# Altium PCB ESP32 With USB C 3rd PCB V1I1.PcbDoc (part 1 of 2)
Units mil, origin at the board's own origin, x right, y up, seen from the top; angles counter-clockwise.
Board outline 2700 x 1000 mil, 4 copper layers (L1, L2, L3, L4), stack 61.583 mil thick; 64 components, 73 nets, 299 pads, 161 vias.
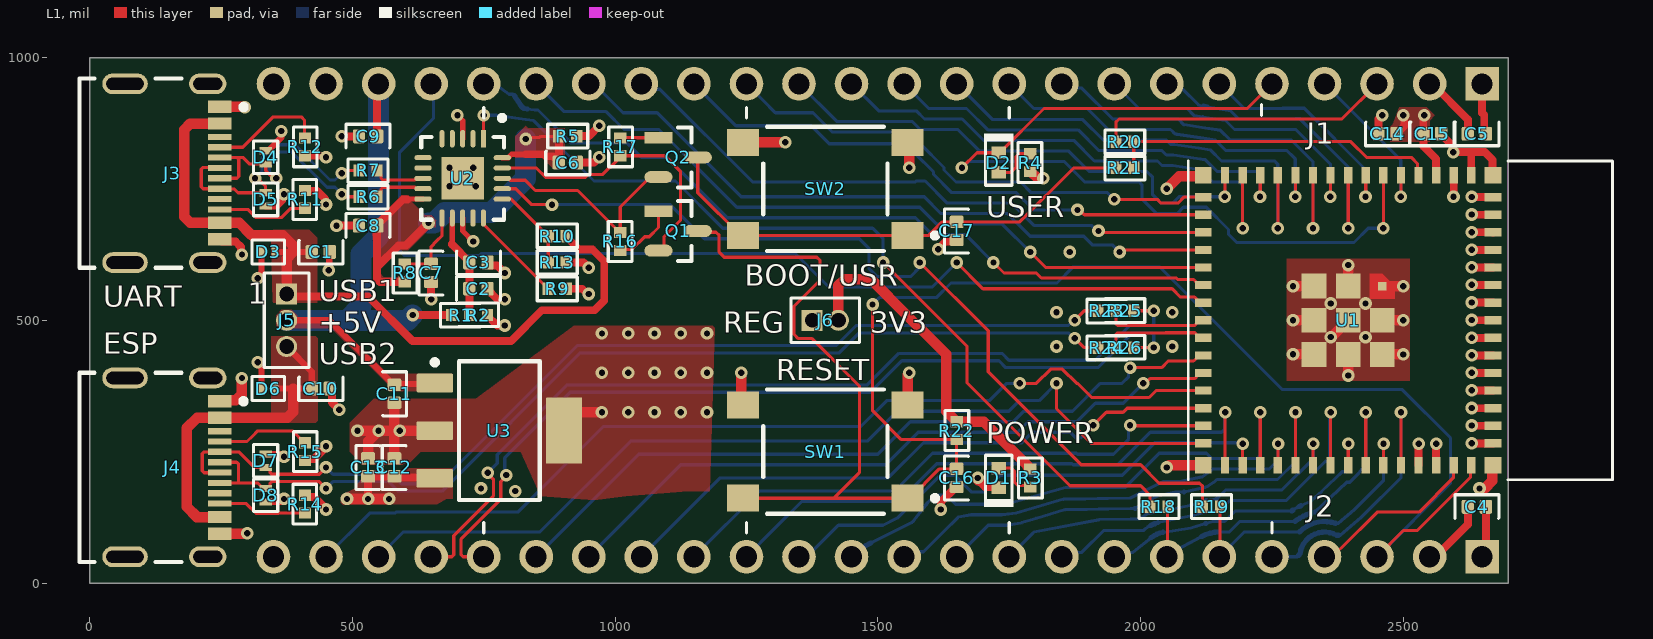
[diagram p0: L1 view]
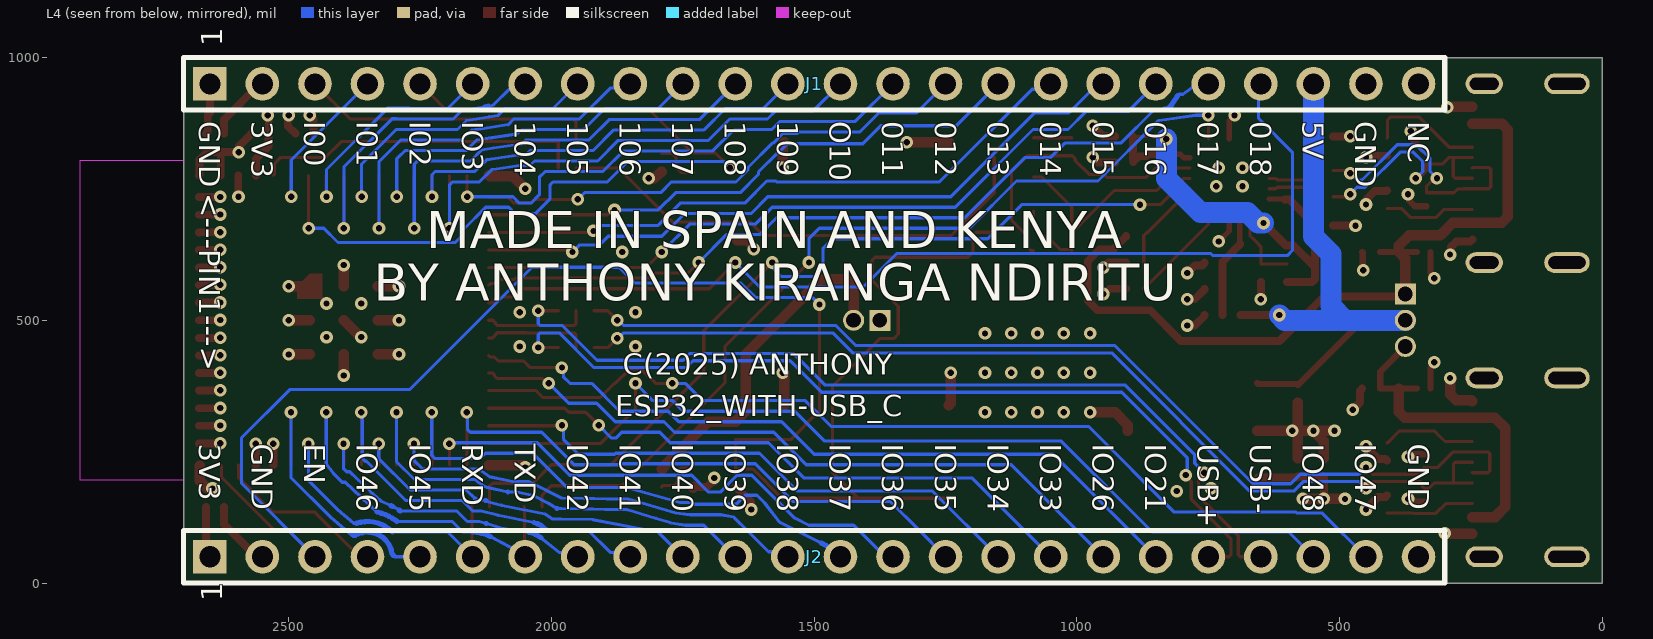
[diagram p1: L4 view, seen from below]
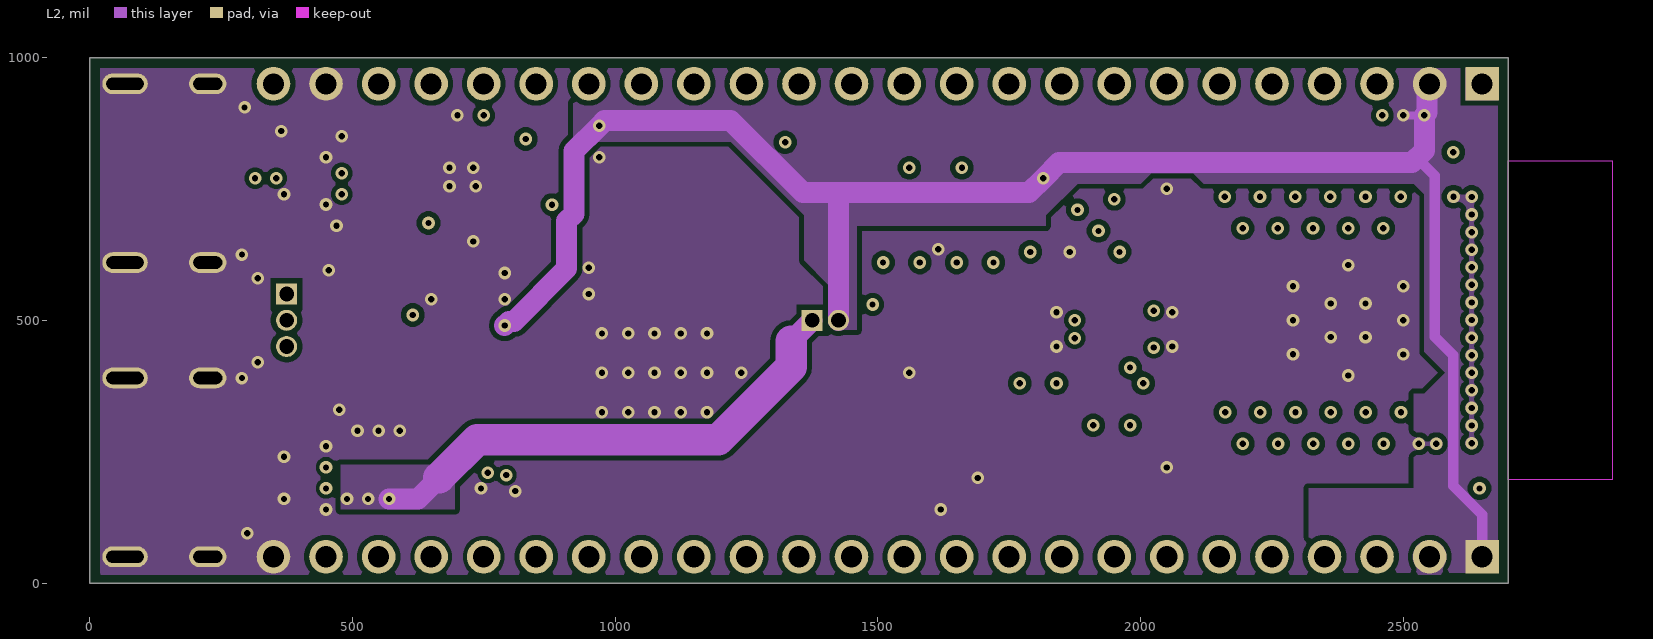
[diagram p2: L2]
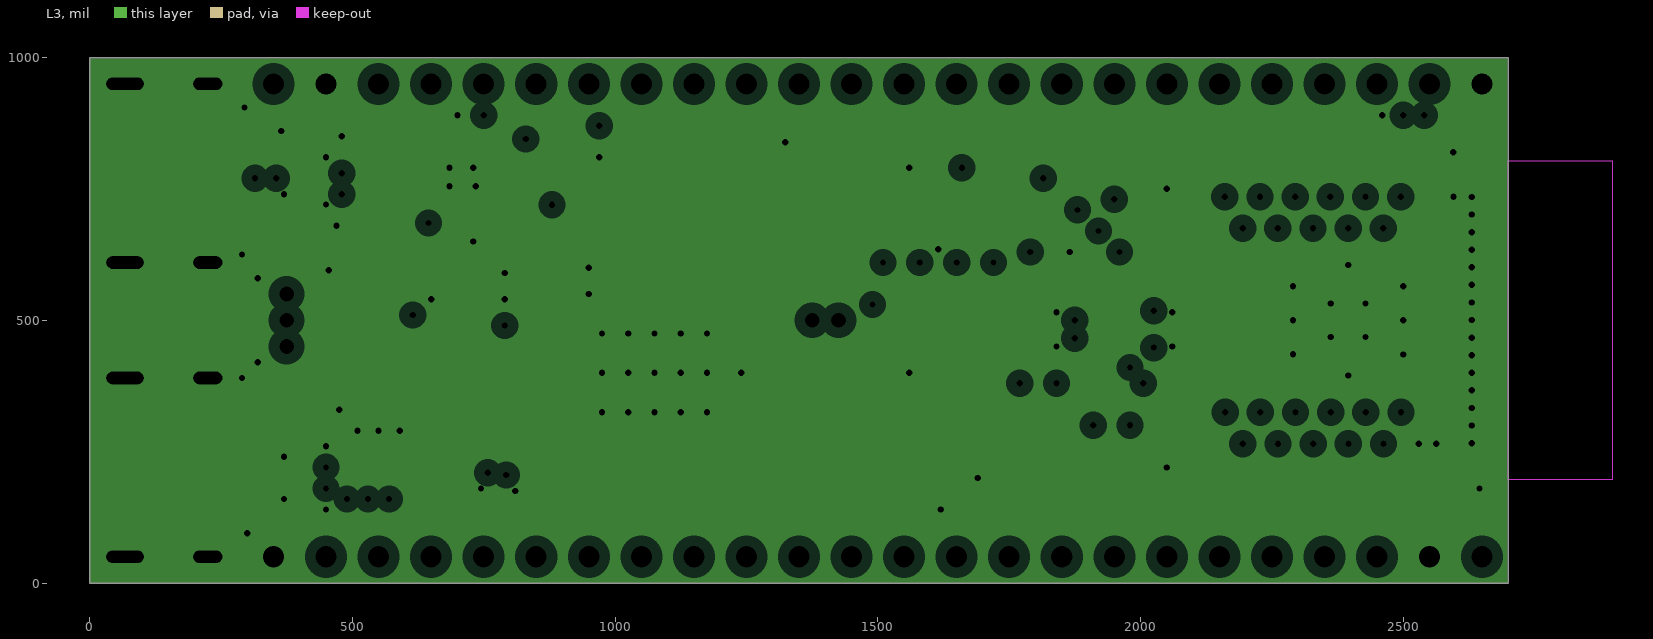
[diagram p3: L3, clearances drawn from the general rule]
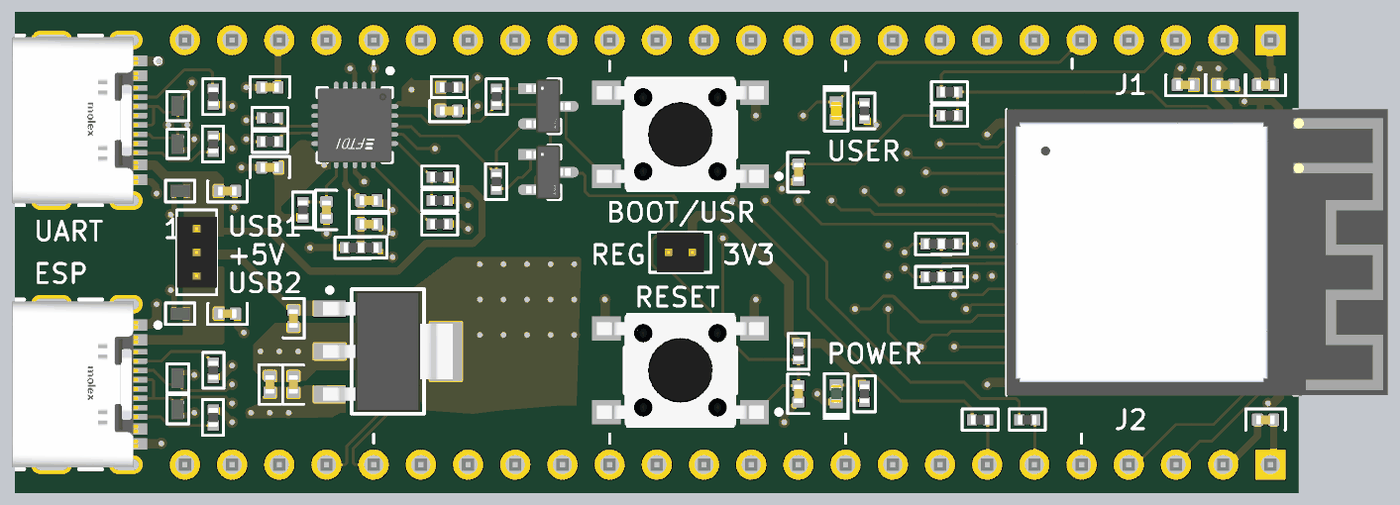
[diagram p4: 3D render of the assembled board from above, using the file's embedded part models]

## Layer stack, top to bottom
Top Solder: solder mask 0.4, Solder Resist, Dk 3.5
L1: signal copper 1.378
Dielectric 2: prepreg 3.9134, PP-006, Dk 4.1
L2: signal copper 0.5984
Dielectric 1: dielectric 49.8031, FR-4, Dk 4.8
L3: plane copper 0.5984, net GND
Dielectric 3: prepreg 3.9134, PP-006, Dk 4.1
L4: signal copper 1.378
Bottom Solder: solder mask 0.4, Solder Resist, Dk 3.5

## Board outline
0,0 2700,0 2700,1000 0,1000

## Design rules (kind name [scope] priority, off if disabled: settings)
Clearance SMALLER [(WithinRoom('FTDI') or WithinRoom('USBC2') or WithinRoom('USBC1')) And (Layer = 'L1')] p1: gap=6 ignorepadtopadclearanceinfootprint=FALSE
Clearance "DIFF90 Clearance" [InDifferentialPairClass('DIFF90')] p2: gap=8 ignorepadtopadclearanceinfootprint=FALSE
Clearance [All] p3: gap=10 ignorepadtopadclearanceinfootprint=FALSE except(6: SMDPad-SMDPad)
ComponentClearance R24R26 [InComponent('R24') vs InComponent('R26')] p1: gap=0 collisioncheckmode=3 verticalgap=0 showdistances=FALSE
ComponentClearance R23R25 [InComponent('R23') vs InComponent('R25')] p2: gap=0 collisioncheckmode=3 verticalgap=0 showdistances=FALSE
ComponentClearance R1R2 [InComponent('R1') vs InComponent('R2')] p3: gap=0 collisioncheckmode=3 verticalgap=0 showdistances=FALSE
ComponentClearance [All] p4: gap=10 collisioncheckmode=3 verticalgap=10 showdistances=FALSE
DiffPairsRouting DIFF90 [InDifferentialPairClass('DIFF90')] p1: maxlimit=8.1 minlimit=8 mostfreqgap=8 toplayer_minwidth=6.03 toplayer_maxwidth=6.23 toplayer_prefwidth=6.03 midlayer1_minwidth=5.1 midlayer1_maxwidth=5.2 midlayer1_prefwidth=5.1 bottomlayer_minwidth=6.03 bottomlayer_maxwidth=6.23 bottomlayer_prefwidth=6.03 maxuncoupledlength=500
MinimumSolderMaskSliver [All] p1: minsoldermaskwidth=3.15
PlaneClearance [All] p1: clearance=20
PlaneConnect [All] p1: pad.planeconnectstyle=Relief pad.reliefexpansion=20 pad.reliefentries=4 pad.reliefconductorwidth=20 pad.reliefairgap=10 via.planeconnectstyle=Direct via.reliefexpansion=20 via.reliefentries=4 via.reliefconductorwidth=10 via.reliefairgap=10
PolygonConnect [All] p1: connectstyle=Direct reliefconductorwidth=10 reliefentries=4 polygonreliefangle="90 Angle" airgapwidth=10
RoomDefinition USBC1 [False vs False] p1: confinementstyle=ConfineIn formatcopy=TRUE lockcomponents=FALSE outline 190,930 310,930 310,630 190,630
RoomDefinition USBC2 [False vs False] p2: confinementstyle=ConfineIn formatcopy=TRUE lockcomponents=FALSE outline 190,370 310,370 310,70 190,70
RoomDefinition FTDI [False vs False] p3: confinementstyle=ConfineIn formatcopy=TRUE lockcomponents=FALSE outline 590,890 830,890 830,650 590,650
RoutingVias [All] p1: holewidth=12 width=24 viastyle="Through Hole" minholewidth=12 minwidth=24 maxholewidth=12 maxwidth=24
SilkToSilkClearance [All] p1: silktosilkclearance=6
SilkToSolderMaskClearance [IsPad] p1: minsilkscreentomaskgap=6 clearancetoexposedcopper=TRUE
SolderMaskExpansion [All] p1: expansion=2 istentingtop=FALSE
Width [All] p1: maxlimit=100 minlimit=6 preferedwidth=10 minimp=50.000000 maximp=50.000000 favimp=50.000000
23 further rules are at their usual default settings.

## Classes and differential pairs
differential pair class DIFF90: CON1_USB CON2_USB CON_ESP_USB ESP_USB FTDI_USB
differential pair FTDI_USB: +FTDI_USB_P -FTDI_USB_N
differential pair ESP_USB: +ESP_USB_P -ESP_USB_N
differential pair CON_ESP_USB: +CON_ESP_USB_P -CON_ESP_USB_N
differential pair CON2_USB: +CON2_USB_P -CON2_USB_N
differential pair CON1_USB: +CON1_USB_P -CON1_USB_N

## Components (designator, comment, footprint, x,y, rotation, side; value= is the part's Value field where it differs from the comment)
C1 "100nf, 50V" CAPC1005X65N 440,630 r0 top
C2 "4µ7, 16V" CAPC1005X65N 740,560 r180 top
C3 "100nf, 50V" CAPC1005X65N 740,610 r0 top
C4 "100nf, 50V" CAPC1005X65N 2640,145 r180 top
C5 "100nf, 50V" CAPC1005X65N 2640,855 r0 top
C6 "100nf, 50V" CAPC1005X65N 910,800 r0 top
C7 "100nf, 50V" CAPC1005X65N 650,590 r270 top
C8 "100nf, 50V" CAPC1005X65N 530,680 r180 top
C9 "100nf, 50V" CAPC1005X65N 530,850 r180 top
C10 "100nf, 50V" CAPC1005X65N 440,370 r0 top
C11 "4µ7, 16V" CAPC1005X65N 580,360 r90 top
C12 "10µF, 10V" CAPC1005X65N 580,220 r270 top
C13 "10µF, 10V" CAPC1005X65N 530,220 r270 top
C14 "10µF, 10V" CAPC1005X65N 2470,855 r0 top
C15 "100nf, 50V" CAPC1005X65N 2555,855 r0 top
C16 "1uF, 35V" CAPC1005X65N 1650,200 r270 top
C17 "100nf, 50V" CAPC1005X65N 1650,670 r270 top
D1 "GREEN" LED0402G 1730,200 r90 top
D2 "Orange" LED0402OR 1730,800 r270 top
D3 "AQ3045-01ETG" SOD882 340,630 r180 top
D4 "AQ3045-01ETG" SOD882 335,810 r90 top
D5 "AQ3045-01ETG" SOD882 335,730 r270 top
D6 "AQ3045-01ETG" SOD882 340,370 r180 top
D7 "AQ3045-01ETG" SOD882 335,232.8 r90 top
D8 "AQ3045-01ETG" SOD882 335,167.2 r270 top
J1 "22-28-4245" HDR_1*24_2.54MM 2650,950 r90 bottom locked
J2 "22-28-4245" HDR_1*24_2.54MM 2650,50 r90 bottom locked
J3 "217179-0001" FP-2171790001-MFG 112.8,779.92 r270 top locked
J4 "217179-0001" FP-2171790001-MFG 112.8,220.08 r270 top locked
J5 "FTS-103-01-F-S" HDR_1*3_1.27MM 375,550 r0 top locked
J6 "FTS-102-01-F-S" HDR_1*2_1.27MM 1375,500 r90 top locked
Q1 "SS8050-G" FP-SS8050-G-IPC_B 1120,670 r0 top
Q2 "SS8050-G" FP-SS8050-G-IPC_B 1120,810 r0 top
R1 "0R" RESC1005X37N 705.98,510 r0 top
R2 "0R" RESC1005X37N 740,510 r180 top
R3 "1K" RESC1005X37N 1790,200 r90 top
R4 "1K" RESC1005X37N 1790,800 r270 top
R5 "0R" RESC1005X37N 910,850 r180 top
R6 "27R" RESC1005X37N 530,735 r0 top
R7 "27R" RESC1005X37N 530,785 r0 top
R8 "0R" RESC1005X37N 600,590 r90 top
R9 "10K" RESC1005X37N 890,560 r0 top
R10 "4K7" RESC1005X37N 890,660 r180 top
R11 "5K1" RESC1005X37N 410,730 r270 top
R12 "5K1" RESC1005X37N 410,830 r90 top
R13 "10K" RESC1005X37N 890,610 r180 top
R14 "5K1" RESC1005X37N 410,150 r270 top
R15 "5K1" RESC1005X37N 410,250 r90 top
R16 "10K" RESC1005X37N 1010,650 r270 top
R17 "10K" RESC1005X37N 1010,830 r90 top
R18 "0R" RESC1005X37N 2035,145 r180 top
R19 "0R" RESC1005X37N 2135,145 r180 top
R20 "27R" RESC1005X37N 1970,840 r0 top
R21 "27R" RESC1005X37N 1970,790 r0 top
R22 "10K" RESC1005X37N 1650,290 r90 top
R23 "0R" RESC1005X37N 1935.98,518 r0 top
R24 "0R" RESC1005X37N 1935.98,448 r0 top
R25 "0R" RESC1005X37N 1970,518 r180 top
R26 "0R" RESC1005X37N 1970,448 r180 top
SW1 "PTS645SH50SMTR92LFS" FP-PTS645SH50SMTR92LFS-MFG 1400,250 r180 top locked
SW2 "PTS645SH50SMTR92LFS" FP-PTS645SH50SMTR92LFS-MFG 1400,750 r180 top locked
U1 "ESP32-S3-MINI-1-N8" XCVR_ESP32-S3-MINI-1-N8 2395.04,500 r270 top locked
U2 "FT231XQ-R" FP-QFN-20-IPC_B 710,770 r270 top locked
U3 "TL1963A-33DCYR" DCY0004A_N 780,290 r0 top locked

## Footprints (in the part's own frame and the unit in brackets; to place one, negate y for a bottom-side part, rotate by r counter-clockwise, add the part's x,y. Pads: shape width x height; smd on the part's side, far side on the other; paste and mask are expansions set on the pad)
CAPC1005X65N [mm]
  rrect25% 0.6x0.67 smd: 1(-0.437,0) 2(0.437,0)
  silkscreen extent -1.07,-0.58 1.07,0.56, body extent -0.5,-0.25 0.5,0.25, height 0.65
DCY0004A_N [mm] "SOT223, 4-Leads, Body 6.7x3.7mm, Pitch 2.3mm, IPC Medium Density"
  rrect11% 1.75x0.9 smd: 1(-3.125,2.3) 2(-3.125,0) 3(-3.125,-2.3)
  rrect6% 1.75x3.2 smd: 4(3.125,0)
  silkscreen extent -3.25,-3.35 1.95,3.42, body extent -3.5,-3.25 3.5,3.25, height 1.62
FP-2171790001-MFG [mm]
  rect 0.6x1.15 smd paste+0 mask+0: A1B12(-3.2,3.425) A4B9(-2.4,3.425) B1A12(3.2,3.425) B4A9(2.4,3.425)
  rect 0.3x1.15 smd paste+0 mask+0: A5(-1.25,3.425) A6(-0.25,3.425) A7(0.25,3.425) A8(1.25,3.425) B5(1.75,3.425) B6(0.75,3.425) B7(-0.75,3.425) B8(-1.75,3.425)
  rrect100% 1x1.8 hole 1.4 slot 0.6 at 0 deg paste-2539.97 mask+0: S1(-4.32,2.85) S2(4.32,2.85)
  rrect100% 1x2.2 hole 1.8 slot 0.6 at 0 deg paste-2539.97 mask+0: S3(-4.32,-1.15) S4(4.32,-1.15)
  silkscreen extent -4.57,-3.35 4.57,4.7, body extent -4.92,-3.45 4.92,4.1, height 0.25
FP-PTS645SH50SMTR92LFS-MFG [mm]
  rect 1.55x1.3 smd paste+0 mask+0: 1(-3.975,2.25) 2(3.975,2.25) 3(-3.975,-2.25) 4(3.975,-2.25)
  silkscreen extent -5.43,-3 3,3, body extent -4.5,-3 4.5,3, height 4.3
FP-QFN-20-IPC_B [mm]
  rect 0.84x0.242 smd paste+0 mask+0: 1(-1.916,1)
  rrect100% 0.84x0.242 smd paste+0 mask+0: 2(-1.916,0.5) 3(-1.916,0) 4(-1.916,-0.5) 5(-1.916,-1) 11(1.916,-1) 12(1.916,-0.5) 13(1.916,0) 14(1.916,0.5) 15(1.916,1)
  rrect100% 0.242x0.84 smd paste+0 mask+0: 6(-1,-1.916) 7(-0.5,-1.916) 8(0,-1.916) 9(0.5,-1.916) 10(1,-1.916) 16(1,1.916) 17(0.5,1.916) 18(0,1.916) 19(-0.5,1.916) 20(-1,1.916)
  rect 2.05x2.05 smd paste-1000 mask+0: 21(0,0)
  silkscreen extent -3.05,-2 2,2.03, body extent -2.59,-2.59 2.59,2.59, height 0.25
FP-SS8050-G-IPC_B [mm]
  rect 1.357x0.572 smd paste+0 mask+0: 1(-0.951,0.95)
  rrect100% 1.357x0.572 smd paste+0 mask+0: 2(-0.951,-0.95) 3(0.951,0)
  silkscreen extent 0,-1.45 0.65,1.45, body extent -1.88,-1.7 1.88,1.7, height 0.25
HDR_1*2_1.27MM [mil]
  rect 40x40 hole 28: 1(0,0)
  round 40 hole 28: 2(0,-50)
  silkscreen extent -42,-90 43,40, body extent -42,-75 43,25, height 154
HDR_1*3_1.27MM [mil]
  rect 40x40 hole 28: 1(0,0)
  round 40 hole 28: 2(0,-50) 3(0,-100)
  silkscreen extent -42,-140 42,40, body extent -42,-125 42,25, height 154
HDR_1*24_2.54MM [mil]
  rect 64x64 hole 40: 1(0,0)
  round 64 hole 40: 2(0,-100) 3(0,-200) 4(0,-300) 5(0,-400) 6(0,-500) 7(0,-600) 8(0,-700) 9(0,-800) 10(0,-900) 11(0,-1000) 12(0,-1100) 13(0,-1200) 14(0,-1300) 15(0,-1400) 16(0,-1500) 17(0,-1600) 18(0,-1700) 19(0,-1800) 20(0,-1900) 21(0,-2000) 22(0,-2100) 23(0,-2200) 24(0,-2300)
  silkscreen extent -50,-2350 50,50, body extent -49,-2350 49,50, height 386
LED0402G [mm]
  rect 0.6x0.7 smd: 1(-0.475,0) 2(0.475,0)
  silkscreen extent -1.4,-0.71 1.09,0.71, body extent -0.5,-0.3 0.5,0.3, height 0.21
LED0402OR [mm]
  rect 0.6x0.7 smd: 1(-0.475,0) 2(0.475,0)
  silkscreen extent -1.4,-0.71 1.09,0.71, body extent -0.5,-0.3 0.5,0.3, height 0.21
RESC1005X37N [mm]
  rect 0.54x0.6 smd: 1(-0.432,0) 2(0.432,0)
  silkscreen extent -0.97,-0.58 0.97,0.56, body extent -0.5,-0.25 0.5,0.25, height 0.37
SOD882 [mm]
  rect 0.35x0.6 smd: 1(-0.325,0) 2(0.325,0)
  silkscreen extent -0.79,-0.58 0.79,0.58, body extent -0.54,-0.34 0.54,0.34, height 0.44
XCVR_ESP32-S3-MINI-1-N8 [mm]
  rect 0.8x0.4 smd: 1(-7,5.95) 2(-7,5.1) 3(-7,4.25) 4(-7,3.4) 5(-7,2.55) 6(-7,1.7) 7(-7,0.85) 8(-7,0) 9(-7,-0.85) 10(-7,-1.7) 11(-7,-2.55) 12(-7,-3.4) 13(-7,-4.25) 14(-7,-5.1) 15(-7,-5.95) 31(7,-5.95) 32(7,-5.1) 33(7,-4.25) 34(7,-3.4) 35(7,-2.55) 36(7,-1.7) 37(7,-0.85) 38(7,0) 39(7,0.85) 40(7,1.7) 41(7,2.55) 42(7,3.4) 43(7,4.25) 44(7,5.1) 45(7,5.95)
  rect 0.4x0.8 smd: 16(-5.95,-7) 17(-5.1,-7) 18(-4.25,-7) 19(-3.4,-7) 20(-2.55,-7) 21(-1.7,-7) 22(-0.85,-7) 23(0,-7) 24(0.85,-7) 25(1.7,-7) 26(2.55,-7) 27(3.4,-7) 28(4.25,-7) 29(5.1,-7) 30(5.95,-7) 46(5.95,7) 47(5.1,7) 48(4.25,7) 49(3.4,7) 50(2.55,7) 51(1.7,7) 52(0.85,7) 53(0,7) 54(-0.85,7) 55(-1.7,7) 56(-2.55,7) 57(-3.4,7) 58(-4.25,7) 59(-5.1,7) 60(-5.95,7)
  rect 1.2x1.2 smd: 61(0,0) 67(0,1.65) 68(1.65,1.65) 69(-1.65,0) 70(1.65,0) 71(-1.65,-1.65) 72(0,-1.65) 73(1.65,-1.65)
  rect 0.8x0.8 smd: 62(-7,7) 63(-7,-7) 64(7,-7) 65(7,7)
  rect 0.4x0.4 smd paste-1 mask+0: 66(-1.65,1.65)
  L1 region: -1.05,1.05 -2.25,1.05 -2.25,1.65 -1.65,2.25 -1.05,2.25
  Keep-Out Layer region: 7.7,7.725 -7.7,7.725 -7.7,12.775 7.7,12.775
  Keep-Out Layer region: 7.7,7.725 -7.7,7.725 -7.7,12.775 7.7,12.775
  silkscreen extent -7.7,-7.73 7.7,12.78, body extent -7.7,-7.72 7.7,12.78, height 2.56

## Part data
C1 C3 C4 C5 C6 C7 C8 C9 C10 C15 C17: library part CL05B104KB5NNNC, "CAP CER 0.1UF 50V X7R 0402", Capacitance=100nF, Case/Package=343Case, Dielectric=1511DielectricType, LCSC Part Number=C960916, Manufacturer=Samsung, Max Operating Temperature=125°C, Min Operating Temperature=-55°C, Supplier Part Number=1276-CL05B104KB5NNNCCT-ND, Tolerance=10%, Voltage Rating=50V, Category="Ceramic Capacitors", ComponentLink1Description=https://datasheet.octopart.com/CL05B104KB5NNNC-Samsung-datasheet-97040617.pdf?src-supplier=Future+Electronics, ComponentLink1URL=https://datasheet.octopart.com/CL05B104KB5NNNC-Samsung-datasheet-97040617.pdf?src-supplier=Future+Electronics, ComponentLink2Description=https://datasheet.octopart.com/CL05B104KB5NNNC-Samsung-datasheet-8326407.pdf?src-supplier=TME, ComponentLink2URL=https://datasheet.octopart.com/CL05B104KB5NNNC-Samsung-datasheet-8326407.pdf?src-supplier=TME, Height=550um, Manufacturer Part Number=CL05B104KB5NNNC, Material=4241ConductorMaterial, Pricing="1=0.08, 10=0.014, 50=0.0096, 100=0.0077 (USD)", RoHS=Yes, RoHS Compliant=Yes, Stock=285974, Supplier=Digikey, Voltage Rating (DC)=50V
C2 C11: library part CL05A475MO5NUNC, "CAP CER 4.7UF 16V X5R 0402", Capacitance=4.7uF, Case Code (Imperial)=0402, Case Code (Metric)=1005, LCSC Part Number=C318563, Manufacturer=Samsung, Max Operating Temperature=85°C, Min Operating Temperature=-55°C, Supplier Part Number=1276-6836-1-ND, Tolerance=20%, Voltage Rating=16V, Case/Package=0402, Category="Ceramic Capacitors", ComponentLink1Description=http://www.farnell.com/datasheets/2710653.pdf?src-supplier=Farnell, ComponentLink1URL=http://www.farnell.com/datasheets/2710653.pdf?src-supplier=Farnell, ComponentLink2Description=http://www.samsungsem.com/kr/support/product-search/mlcc/CL05A475MO5NUNC.jsp?src-supplier=Digikey, ComponentLink2URL=http://www.samsungsem.com/kr/support/product-search/mlcc/CL05A475MO5NUNC.jsp?src-supplier=Digikey, ComponentLink3Description=http://www.farnell.com/datasheets/2710653.pdf?src-supplier=Element14, ComponentLink3URL=http://www.farnell.com/datasheets/2710653.pdf?src-supplier=Element14, ComponentLink4Description=https://datasheet.octopart.com/CL05A475MO5NUNC-Samsung-Electro-Mechanics-datasheet-123102911.pdf?src-supplier=Future+Electronics, ComponentLink4URL=https://datasheet.octopart.com/CL05A475MO5NUNC-Samsung-Electro-Mechanics-datasheet-123102911.pdf?src-supplier=Future+Electronics, ComponentLink5Description=http://www.farnell.com/datasheets/2710653.pdf?src-supplier=Newark, ComponentLink5URL=http://www.farnell.com/datasheets/2710653.pdf?src-supplier=Newark, Height=550um, Length=0.039inch, Manufacturer Part Number=CL05A475MO5NUNC, Material=4241ConductorMaterial, Mount="Surface Mount", Packaging="Cut Tape", Pricing="1=0.14, 10=0.088, 50=0.085 (USD)", RoHS=Yes, RoHS Compliant=Yes, Series=CL, Stock=33153, Supplier=Digikey, Thickness=0.022inch, Voltage Rating (DC)=16V, Width=0.02inch
C12 C13 C14: library part CL05A106MP5NRNC, "CAP CER 10UF 10V X5R 0402", Capacitance=10uF, Case/Package=343Case, LCSC Part Number=C3035383, Manufacturer=Samsung, Max Operating Temperature=85°C, Min Operating Temperature=-55°C, Supplier Part Number=1276-CL05A106MP5NRNCCT-ND, Tolerance=20%, Voltage Rating=10V, Category="Ceramic Capacitors", Height=550um, Manufacturer Part Number=CL05A106MP5NRNC, Material=4241ConductorMaterial, Pricing="1=0.24, 10=0.141, 50=0.1014, 100=0.0894, 500=0.07112, 1000=0.06284, 2500=0.05624, 5000=0.05227 (USD)", RoHS=Yes, RoHS Compliant=Yes, Stock=2113, Supplier=Digikey
C16: library part CL05A105KL5NRNC, "CAP CER 1UF 35V X5R 0402", Capacitance=1uF, Case Code (Imperial)=0402, Case Code (Metric)=1005, LCSC Part Number=C307413, Manufacturer=Samsung, Max Operating Temperature=85°C, Min Operating Temperature=-55°C, Supplier Part Number=1276-6796-1-ND, Tolerance=10%, Voltage Rating=35V, Case/Package=0402, Category="Ceramic Capacitors", ComponentLink1Description=http://www.samsungsem.com/kr/support/product-search/mlcc/CL05A105KL5NRNC.jsp?src-supplier=Digikey, ComponentLink1URL=http://www.samsungsem.com/kr/support/product-search/mlcc/CL05A105KL5NRNC.jsp?src-supplier=Digikey, ComponentLink2Description=https://datasheet.octopart.com/CL05A105KL5NRNC-Samsung-datasheet-8326407.pdf?src-supplier=TME, ComponentLink2URL=https://datasheet.octopart.com/CL05A105KL5NRNC-Samsung-datasheet-8326407.pdf?src-supplier=TME, Height=550um, Length=0.039inch, Manufacturer Part Number=CL05A105KL5NRNC, Material=4241ConductorMaterial, Mount="Surface Mount", Packaging="Cut Tape", Pricing="1=0.29, 10=0.17, 50=0.124, 100=0.1097, 500=0.08014, 1000=0.07807, 2500=0.07048, 5000=0.06578 (USD)", RoHS=Yes, RoHS Compliant=Yes, Series=CL, Stock=31548, Supplier=Digikey, Thickness=0.022inch, Width=0.02inch
D1: library part VLMG1500-GS08, "LED YLW-GRN 0402 SMD", Case Code (Imperial)=0402, Case Code (Metric)=1005, Color=Green,Yellow, Forward Current=30mA, Forward Voltage=2V, Illumination Color=Green, LCSC Part Number=C511404, Lens Color=Clear, Manufacturer=Vishay, Max Operating Temperature=85°C, Min Operating Temperature=-30°C, Package Quantity=1, Power Dissipation=75mW, Reverse Voltage=5V, Supplier Part Number=VLMG1500-GS08CT-ND, Test Current=20mA, Case/Package=0402, Category=LEDs, ComponentLink1Description=https://datasheet.ciiva.com/12071/vlmo1500-244705-12071911.pdf?src-supplier=Mouser, ComponentLink1URL=https://datasheet.ciiva.com/12071/vlmo1500-244705-12071911.pdf?src-supplier=Mouser, ComponentLink2Description=https://datasheet.ciiva.com/30005/vlmo1500-30005134.pdf?src-supplier=Avnet, ComponentLink2URL=https://datasheet.ciiva.com/30005/vlmo1500-30005134.pdf?src-supplier=Avnet, Depth=0.5mm, Dominant Wavelength=571nm, Height=0.35mm, Lead Free="Lead Free", Length=1mm, Lens Style=Rectangular, Luminous Intensity=35mcd, Manufacturer Part Number=VLMG1500-GS08, Mount="Surface Mount", Number of Elements=1, Number of LEDs=1, Number of Pins=2, Packaging="Tape and Reel", Power Rating=75mW, Pricing="1=0.24, 10=0.164, 100=0.1147, 500=0.09218, 1000=0.0847 (USD)", Radiation Hardening=No, Reach SVHC Compliant=Unknown, RoHS=Yes, RoHS Compliant=Yes, Series=CHipLED, Stock=200967, Supplier=Digikey, Viewing Angle=130°, Wavelength=571nm, Width=0.5mm
D2: library part VLMO1500-GS08, "LED ORANGE 0402 SMD", LCSC Part Number=C3000857, Manufacturer=Vishay, Supplier Part Number=VLMO1500-GS08CT-ND, Category=LEDs, ComponentLink1Description=https://datasheet.ciiva.com/13945/vlmo1500-13945355.pdf?src-supplier=Digikey, ComponentLink1URL=https://datasheet.ciiva.com/13945/vlmo1500-13945355.pdf?src-supplier=Digikey, ComponentLink2Description=https://datasheet.ciiva.com/13945/vlmo1500-13945356.pdf?src-supplier=Digikey, ComponentLink2URL=https://datasheet.ciiva.com/13945/vlmo1500-13945356.pdf?src-supplier=Digikey, ComponentLink3Description=https://datasheet.ciiva.com/13945/vlmo1500-13945357.pdf?src-supplier=Digikey, ComponentLink3URL=https://datasheet.ciiva.com/13945/vlmo1500-13945357.pdf?src-supplier=Digikey, Manufacturer Part Number=VLMO1500-GS08, Pricing="1=0.24, 10=0.164, 100=0.1147, 500=0.09218, 1000=0.0847 (USD)", RoHS=Yes, Stock=110225, Supplier=Digikey
D3 D4 D5 D6 D7 D8: "TVS DIODE 5.3VWM 12VC SOD882", LCSC Part Number=C3710326, Leakage Current=100nA, Manufacturer=Littelfuse, Max Operating Temperature=150°C, Min Breakdown Voltage=6.8V, Min Operating Temperature=-55°C, Operating Supply Voltage=5.3V, Peak Pulse Current=3A, Peak Pulse Power=40W, Power Line Protection=No, Supplier Part Number=F9321CT-ND, Category="TVS Diodes", ComponentLink1Description=https://www.littelfuse.com/~/media/electronics/datasheets/tvs_diode_arrays/littelfuse_tvs_diode_array_aq3045_datasheet.pdf.pdf?src-supplier=Digikey, ComponentLink1URL=https://www.littelfuse.com/~/media/electronics/datasheets/tvs_diode_arrays/littelfuse_tvs_diode_array_aq3045_datasheet.pdf.pdf?src-supplier=Digikey, ComponentLink2Description=http://www.littelfuse.com/~/media/electronics/datasheets/tvs_diode_arrays/littelfuse_tvs_diode_array_aq3045_datasheet.pdf.pdf?src-supplier=Digikey, ComponentLink2URL=http://www.littelfuse.com/~/media/electronics/datasheets/tvs_diode_arrays/littelfuse_tvs_diode_array_aq3045_datasheet.pdf.pdf?src-supplier=Digikey, Diode Type=ZENER, Manufacturer Part Number=AQ3045-01ETG, Mount="Surface Mount", Number of Bidirectional Channels=1, Number of Channels=1NUMBER, Packaging="Cut Tape", Pricing="1=0.43, 10=0.271, 100=0.141, 500=0.131 (USD)", Reverse Standoff Voltage=5.3V, RoHS=Yes, RoHS Compliant=Yes, Series="Automotive, AEC-Q101, AQ3045, SPA®", Stock=7306, Supplier=Digikey
J1 J2: "CONN HEADER VERT 24POS 2.54MM", Current Rating=4A, Housing Color=Black, LCSC Part Number=C7145888, Manufacturer=Molex, Supplier Part Number=900-0022284245-ND, Category="Headers and Wire Housings", ComponentLink1Description=https://datasheet.ciiva.com/6814/022284363-sd-6814049.pdf?src-supplier=Digikey, ComponentLink1URL=https://datasheet.ciiva.com/6814/022284363-sd-6814049.pdf?src-supplier=Digikey, ComponentLink2Description=https://datasheet.ciiva.com/10075/0022284245-pcb-headers-10075617.pdf?src-supplier=Avnet, ComponentLink2URL=https://datasheet.ciiva.com/10075/0022284245-pcb-headers-10075617.pdf?src-supplier=Avnet, ComponentLink3Description=https://datasheet.ciiva.com/1433/1597854-1433759.pdf?src-supplier=Element14, ComponentLink3URL=https://datasheet.ciiva.com/1433/1597854-1433759.pdf?src-supplier=Element14, Contact Material=Brass, Contact Plating=Gold, Gender=Male, Lead Free="Lead Free", Manufacturer Part Number=22-28-4245, Mount="Through Hole", Number of Circuits=24, Number of Contacts=24, Number of Positions=24, Number of Rows=1, Orientation=Vertical, Packaging=Bulk, Pitch=2.54mm, Plating=Tin, Pricing="1=1.21, 10=1.024, 100=0.8699, 500=0.77638, 1000=0.73932, 5000=0.65998, 10000=0.62851 (USD)", Reach SVHC Compliant=4188SVHC, RoHS=No, Stock=1536, Supplier=Digikey, Termination=Solder
J3 J4: "CONN RCP USB2.0 TYP C 24P SMD RA", Current Rating=1.25A, LCSC Part Number=C3197684, Manufacturer=Molex, Max Operating Temperature=85°C, Min Operating Temperature=-40°C, Supplier Part Number=900-2171790001CT-ND, Voltage Rating=30V, Category=Connectors, Contact Material=Nickel,Gold, Gender=Receptacle, Height=3.36mm, Manufacturer Part Number=217179-0001, Number of Contacts=16, Pricing="1=0.83, 10=0.704, 25=0.6596, 50=0.628, 100=0.598, 250=0.56052, 500=0.53374 (USD)", RoHS=No, Stock=16804, Supplier=Digikey, USB Standard="USB 2.0"
J5: "CONN HEADER VERT 3POS 1.27MM", LCSC Part Number=C3333578, Manufacturer=Samtec, Supplier Part Number=612-FTS-103-01-F-S-ND, Category=Connectors, ComponentLink1Description=http://www.samtec.com/documents/webfiles/pdf/FTS.pdf?src-supplier=Avnet, ComponentLink1URL=http://www.samtec.com/documents/webfiles/pdf/FTS.pdf?src-supplier=Avnet, ComponentLink2Description=http://suddendocs.samtec.com/prints/fts-1xx-xx-xx-xx-xx-mkt.pdf?src-supplier=Digikey, ComponentLink2URL=http://suddendocs.samtec.com/prints/fts-1xx-xx-xx-xx-xx-mkt.pdf?src-supplier=Digikey, ComponentLink3Description=https://datasheet.octopart.com/FTS-103-01-F-S-Samtec-datasheet-116535195.pdf?src-supplier=Toby+Electronics, ComponentLink3URL=https://datasheet.octopart.com/FTS-103-01-F-S-Samtec-datasheet-116535195.pdf?src-supplier=Toby+Electronics, ComponentLink4Description=https://datasheet.octopart.com/FTS-103-01-F-S-Samtec-datasheet-151470456.pdf?src-supplier=Sager+Electronics, ComponentLink4URL=https://datasheet.octopart.com/FTS-103-01-F-S-Samtec-datasheet-151470456.pdf?src-supplier=Sager+Electronics, ComponentLink5Description=https://datasheet.octopart.com/FTS-103-01-F-S-Samtec-datasheet-118493358.pdf?src-supplier=Electro+Sonic, ComponentLink5URL=https://datasheet.octopart.com/FTS-103-01-F-S-Samtec-datasheet-118493358.pdf?src-supplier=Electro+Sonic, Gender=29Gender, Manufacturer Part Number=FTS-103-01-F-S, Pricing="1=0.73, 50=0.6378, 100=0.5407, 500=0.4491, 1000=0.384 (USD)", RoHS=Yes, Stock=679, Supplier=Digikey
J6: "CONN HEADER VERT 2POS 1.27MM", Flammability Rating="UL94 V-0", Insulation Color=Black, LCSC Part Number=C6045317, Manufacturer=Samtec, Max Operating Temperature=125°C, Min Operating Temperature=-55°C, Supplier Part Number=SAM15176-ND, Category=Connectors, ComponentLink1Description=http://www.samtec.com/documents/webfiles/pdf/FTS.pdf?src-supplier=Avnet, ComponentLink1URL=http://www.samtec.com/documents/webfiles/pdf/FTS.pdf?src-supplier=Avnet, ComponentLink2Description=https://datasheet.octopart.com/FTS-102-01-F-S-Samtec-datasheet-118493358.pdf?src-supplier=Electro+Sonic, ComponentLink2URL=https://datasheet.octopart.com/FTS-102-01-F-S-Samtec-datasheet-118493358.pdf?src-supplier=Electro+Sonic, Contact Finish - Mating=GOLD, Contact Material=Bronze, Contact Plating=Gold, Contact Shape=Square, Contact Type="Male Pin", Fastening Type=Pull, Gender=Male, Insulation Material=Polymer, Manufacturer Part Number=FTS-102-01-F-S, Mount="Through Hole", Number of Contacts=2, Number of Positions=2, Number of Rows=1, Packaging=Bulk, Pitch=1.27mm, Pricing="1=0.49, 50=0.4252, 100=0.3608, 500=0.2994, 1000=0.25609, 2000=0.252 (USD)", Radiation Hardening=No, RoHS=Yes, RoHS Compliant=Yes, Series=FTS, Stock=547, Supplier=Digikey, Termination=Solder
Q1 Q2: "TRANS NPN 25V 1.5A SOT-23-3", Case/Package=TO-236-3, Collector Base Voltage (VCBO)=40V, Collector Emitter Breakdown Voltage=25V, Collector Emitter Saturation Voltage=500mV, Collector-emitter Voltage-Max=400mV, Emitter Base Voltage (VEBO)=5V, LCSC Part Number=C164886, Manufacturer=Comchip, Max Collector Current=1.5A, Max Operating Temperature=150°C, Max Power Dissipation=300mW, Supplier Part Number=641-1790-1-ND, Transition Frequency=100MHz, Category=Transistors, ComponentLink1Description="http://www.comchiptech.com/admin/files/product/SS8050-G RevA181526.pdf?src-supplier=Digikey", ComponentLink1URL="http://www.comchiptech.com/admin/files/product/SS8050-G RevA181526.pdf?src-supplier=Digikey", Height=1.15mm, hFE Min=200, Manufacturer Part Number=SS8050-G, Max Breakdown Voltage=25V, Mount="Surface Mount", Number of Elements=1, Packaging="Cut Tape", Power Dissipation=300mW, Pricing="1=0.24, 10=0.148, 100=0.0921, 500=0.06754, 1000=0.05958 (USD)", RoHS=Yes, RoHS Compliant=Yes, Series=-, Stock=51888, Supplier=Digikey
R1 R2 R5 R8 R18 R19 R23 R24 R25 R26: library part RC0402JR-070RL, "RES 0 OHM JUMPER 1/16W 0402", Case Code (Imperial)=0402, Case Code (Metric)=1005, LCSC Part Number=C60485, Manufacturer=Yageo, Max Operating Temperature=155°C, Max Power Dissipation=63mW, Min Operating Temperature=-55°C, Package Quantity=1, Power Rating=62.5mW, Resistance=0mR, Resistance Tolerance=5%, Resistor Type="Thick Film", Supplier Part Number=311-0.0JRCT-ND, Temperature Coefficient=200ppm/°C, Voltage Rating=50V, Case/Package=0402, Category="Chip SMD Resistors", Construction=Rectangular, Contact Plating=Tin,Matte, Depth=0.5mm, Features="Moisture Resistant", Height=0.016inch, Lead Free=5697LeadFree, Length=1mm, Manufacturer Part Number=RC0402JR-070RL, Military Standard=Not, Number of Terminations=2, Packaging="Tape and Reel", Pricing="1=0.1, 10=0.01, 25=0.0064, 50=0.0054, 100=0.0047, 250=0.00392, 500=0.00346, 1000=0.00304, 5000=0.0023 (USD)", Reach SVHC Compliant=Unknown, RoHS=Yes, RoHS Compliant=Yes, Series=RC, Size Code=0402, Supplier=Digikey, Technology="THICK FILM", Termination=SMD/SMT, Tolerance=5%, Width=0.02inch
R3 R4: library part RC0402FR-071KL, "RES 1K OHM 1% 1/16W 0402", Case Code (Imperial)=0402, Case Code (Metric)=1005, LCSC Part Number=C106235, Manufacturer=Yageo, Max Operating Temperature=155°C, Max Power Dissipation=63mW, Min Operating Temperature=-55°C, Power Rating=62.5mW, Resistance=1kR, Resistance Tolerance=1%, Resistor Type="Thick Film", Supplier Part Number=311-1.00KLRCT-ND, Temperature Coefficient=100ppm/°C, Voltage Rating=50V, Case/Package=0402, Category="Chip SMD Resistors", ComponentLink1Description=https://datasheet.ciiva.com/11819/0900766b80c66297-11819477.pdf?src-supplier=Rs, ComponentLink1URL=https://datasheet.ciiva.com/11819/0900766b80c66297-11819477.pdf?src-supplier=Rs, ComponentLink2Description=https://datasheet.ciiva.com/7983/1018594-7983502.pdf?src-supplier=Element14, ComponentLink2URL=https://datasheet.ciiva.com/7983/1018594-7983502.pdf?src-supplier=Element14, ComponentLink3Description=https://datasheet.ciiva.com/22747/1018594-22747513.pdf?src-supplier=Element14, ComponentLink3URL=https://datasheet.ciiva.com/22747/1018594-22747513.pdf?src-supplier=Element14, ComponentLink4Description=https://datasheet.ciiva.com/12666/pyu-rc0402-51-rohs-l-6-r-12666741.pdf?src-supplier=Mouser, ComponentLink4URL=https://datasheet.ciiva.com/12666/pyu-rc0402-51-rohs-l-6-r-12666741.pdf?src-supplier=Mouser, ComponentLink5Description=https://datasheet.ciiva.com/7849/1018594-7849869.pdf?src-supplier=Element14, ComponentLink5URL=https://datasheet.ciiva.com/7849/1018594-7849869.pdf?src-supplier=Element14, ComponentLink6Description=https://datasheet.ciiva.com/7849/1018594-7849871.pdf?src-supplier=Element14, ComponentLink6URL=https://datasheet.ciiva.com/7849/1018594-7849871.pdf?src-supplier=Element14, Construction=Rectangular, Depth=0.5mm, Features="Moisture Resistant", Height=0.32mm, Lead Free=5697LeadFree, Length=1mm, Manufacturer Part Number=RC0402FR-071KL, Military Standard=Not, Number of Pins=2, Number of Terminations=2, Packaging="Tape and Reel", Pricing="1=0.1, 10=0.007, 25=0.006, 50=0.005, 100=0.0041, 250=0.00308 (USD)", Reach SVHC Compliant=No, RoHS=Yes, RoHS Compliant=Yes, Series=RC, Size Code=0402, Stock=1555509, Supplier=Digikey, Technology="THICK FILM", Termination=SMD/SMT, Tolerance=1%, Voltage Rating (AC)=50V, Voltage Rating (DC)=50V, Width=0.5mm
R6 R7 R20 R21: library part RC0402FR-0727RL, "RES 27 OHM 1% 1/16W 0402", Case Code (Imperial)=0402, Case Code (Metric)=1005, LCSC Part Number=C138021, Manufacturer=Yageo, Max Operating Temperature=155°C, Max Power Dissipation=63mW, Min Operating Temperature=-55°C, Power Rating=62.5mW, Resistance Tolerance=1%, Resistor Type="Thick Film", Supplier Part Number=YAG3086CT-ND, Temperature Coefficient=100ppm/°C, Voltage Rating=50V, Case/Package=0402, Category="Chip SMD Resistors", ComponentLink1Description=https://datasheet.ciiva.com/11808/0900766b80c66297-11808450.pdf?src-supplier=Rs, ComponentLink1URL=https://datasheet.ciiva.com/11808/0900766b80c66297-11808450.pdf?src-supplier=Rs, ComponentLink2Description=https://datasheet.ciiva.com/17044/pyu-rc0402-51-rohs-l-6-17044345.pdf?src-supplier=Future+Electronics, ComponentLink2URL=https://datasheet.ciiva.com/17044/pyu-rc0402-51-rohs-l-6-17044345.pdf?src-supplier=Future+Electronics, ComponentLink3Description=https://datasheet.ciiva.com/7849/1018594-7849927.pdf?src-supplier=Element14, ComponentLink3URL=https://datasheet.ciiva.com/7849/1018594-7849927.pdf?src-supplier=Element14, ComponentLink4Description=https://datasheet.ciiva.com/7849/1018594-7849926.pdf?src-supplier=Element14, ComponentLink4URL=https://datasheet.ciiva.com/7849/1018594-7849926.pdf?src-supplier=Element14, ComponentLink5Description=https://datasheet.ciiva.com/15189/getdatasheetpartid-327852-15189402.pdf?src-supplier=Verical, ComponentLink5URL=https://datasheet.ciiva.com/15189/getdatasheetpartid-327852-15189402.pdf?src-supplier=Verical, Construction=Rectangular, Depth=0.5mm, Features="Moisture Resistant", Height=0.016inch, Lead Free="Lead Free", Length=1mm, Manufacturer Part Number=RC0402FR-0727RL, Military Standard=Not, Number of Terminations=2, Packaging="Tape and Reel", Pricing="1=0.1, 10=0.007, 100=0.0061, 1000=0.00408, 2500=0.00357 (USD)", Reach SVHC Compliant=Unknown, Resistance=27R, RoHS=Yes, RoHS Compliant=Yes, Series=RC, Size Code=0402, Stock=307563, Supplier=Digikey, Technology="THICK FILM", Termination=SMD/SMT, Tolerance=1%, Voltage Rating (AC)=50V, Weight=2.3E-05oz, Width=0.5mm
R9 R13 R16 R17 R22: library part AC0402FR-7W10KL, "RES 10 KOHM 1% 1/8W 0402", Case/Package=343Case, LCSC Part Number=C850723, Manufacturer=Yageo, Max Operating Temperature=155°C, Min Operating Temperature=-55°C, Power Rating=125mW, Resistance=10kR, Supplier Part Number=13-AC0402FR-7W10KLCT-ND, Temperature Coefficient=100ppm/°C, Tolerance=1%, Voltage Rating=50V, Category="Chip SMD Resistors", ComponentLink1Description=https://datasheet.octopart.com/AC0402FR-7W10KL-Yageo-datasheet-151884373.pdf?src-supplier=Future+Electronics, ComponentLink1URL=https://datasheet.octopart.com/AC0402FR-7W10KL-Yageo-datasheet-151884373.pdf?src-supplier=Future+Electronics, Height=370um, Manufacturer Part Number=AC0402FR-7W10KL, Packaging=10Packaging, Pricing="1=0.1, 10=0.017, 100=0.0122, 1000=0.00714, 2500=0.0051, 5000=0.00501 (USD)", RoHS=Yes, RoHS Compliant=Yes, Stock=81052, Supplier=Digikey
R10: library part RC0402FR-074K7L, "RES 4.7K OHM 1% 1/16W 0402", Case Code (Imperial)=0402, Case Code (Metric)=1005, LCSC Part Number=C105871, Manufacturer=Yageo, Max Operating Temperature=155°C, Max Power Dissipation=63mW, Min Operating Temperature=-55°C, Power Rating=62.5mW, Resistance=4.7kR, Resistance Tolerance=1%, Resistor Type="Thick Film", Supplier Part Number=311-4.7KLRCT-ND, Temperature Coefficient=100ppm/°C, Voltage Rating=50V, Case/Package=0402, Category="Chip SMD Resistors", ComponentLink1Description=https://datasheet.ciiva.com/22661/1686128-22661342.pdf?src-supplier=Element14, ComponentLink1URL=https://datasheet.ciiva.com/22661/1686128-22661342.pdf?src-supplier=Element14, ComponentLink2Description=https://datasheet.ciiva.com/7850/1018594-7850022.pdf?src-supplier=Element14, ComponentLink2URL=https://datasheet.ciiva.com/7850/1018594-7850022.pdf?src-supplier=Element14, ComponentLink3Description=https://datasheet.ciiva.com/7850/1018594-7850023.pdf?src-supplier=Element14, ComponentLink3URL=https://datasheet.ciiva.com/7850/1018594-7850023.pdf?src-supplier=Element14, Construction=Rectangular, Depth=0.5mm, Features="Moisture Resistant", Lead Free="Lead Free", Length=1mm, Manufacturer Part Number=RC0402FR-074K7L, Military Standard=Not, Number of Pins=2, Number of Terminations=2, Packaging="Tape and Reel", Pricing="1=0.1, 10=0.02, 100=0.009, 1000=0.00474, 2500=0.00381, 5000=0.00328 (USD)", Reach SVHC Compliant=No, RoHS=Yes, RoHS Compliant=Yes, Series=RC, Size Code=0402, Stock=1142924, Supplier=Digikey, Termination=SMD/SMT, Tolerance=1%, Voltage Rating (AC)=50V, Voltage Rating (DC)=50V, Width=0.5mm
R11 R12 R14 R15: library part AC0402FR-075K1L, "RES SMD 5.1K OHM 1% 1/16W 0402", Case Code (Imperial)=0402, Case Code (Metric)=1005, LCSC Part Number=C144745, Manufacturer=Yageo, Max Operating Temperature=155°C, Max Power Dissipation=63mW, Min Operating Temperature=-55°C, Resistance=5.1kR, Supplier Part Number=YAG3503CT-ND, Temperature Coefficient=100ppm/°C, Tolerance=1%, Voltage Rating=50V, Case/Package=0402, Category="Chip SMD Resistors", ComponentLink1Description=https://datasheet.octopart.com/AC0402FR-075K1L-Yageo-datasheet-166720450.pdf?src-supplier=Future+Electronics, ComponentLink1URL=https://datasheet.octopart.com/AC0402FR-075K1L-Yageo-datasheet-166720450.pdf?src-supplier=Future+Electronics, ComponentLink2Description=http://www.yageo.com/NewPortal/yageodocoutput?fileName=/pdf/R-Chip/PYu-AC_51_RoHS_L_6.pdf&src-supplier=Digikey, ComponentLink2URL=http://www.yageo.com/NewPortal/yageodocoutput?fileName=/pdf/R-Chip/PYu-AC_51_RoHS_L_6.pdf&src-supplier=Digikey, ComponentLink3Description=http://www.yageo.com/documents/recent/PYu-AC_51_RoHS_L_2_revised.pdf?src-supplier=Future+Electronics, ComponentLink3URL=http://www.yageo.com/documents/recent/PYu-AC_51_RoHS_L_2_revised.pdf?src-supplier=Future+Electronics, ComponentLink4Description=https://datasheet.octopart.com/AC0402FR-075K1L-Yageo-datasheet-178509465.pdf?src-supplier=Newark, ComponentLink4URL=https://datasheet.octopart.com/AC0402FR-075K1L-Yageo-datasheet-178509465.pdf?src-supplier=Newark, ComponentLink5Description=https://datasheet.octopart.com/AC0402FR-075K1L-Yageo-datasheet-178509465.pdf?src-supplier=Farnell, ComponentLink5URL=https://datasheet.octopart.com/AC0402FR-075K1L-Yageo-datasheet-178509465.pdf?src-supplier=Farnell, Features="Moisture Resistant,Automotive AEC-Q200", Height=0.015inch, Lead Free=5697LeadFree, Length=0.039inch, Manufacturer Part Number=AC0402FR-075K1L, Mount="Surface Mount", Number of Terminations=2, Packaging="Cut Tape", Power Rating=63mW, Pricing="1=0.1, 10=0.009, 25=0.0072, 50=0.0062, 100=0.0051, 250=0.00408, 500=0.00406 (USD)", RoHS=Yes, RoHS Compliant=Yes, Series=AC, Size Code=0402, Stock=22924, Supplier=Digikey, Width=0.02inch
SW1 SW2: "SWITCH TACTILE SPST-NO 0.05A 12V", Contact Current Rating=50mA, Contact Resistance=100mR, Insulation Resistance=100GR, LCSC Part Number=C221869, Manufacturer="ITT C&K", Supplier Part Number=CKN9085CT-ND, Category="Tactile Switches", ComponentLink1Description=https://datasheet.ciiva.com/29903/getdatasheetpartid-773702-29903807.pdf?src-supplier=Verical, ComponentLink1URL=https://datasheet.ciiva.com/29903/getdatasheetpartid-773702-29903807.pdf?src-supplier=Verical, ComponentLink2Description=https://datasheet.ciiva.com/14920/pts645-14920741.pdf?src-supplier=Digikey, ComponentLink2URL=https://datasheet.ciiva.com/14920/pts645-14920741.pdf?src-supplier=Digikey, ComponentLink3Description=https://datasheet.ciiva.com/22637/1707731-22637356.pdf?src-supplier=Element14, ComponentLink3URL=https://datasheet.ciiva.com/22637/1707731-22637356.pdf?src-supplier=Element14, Lead Free=5697LeadFree, Manufacturer Part Number=PTS645SH50SMTR92LFS, Number of Positions=2NUMBER, Pricing="1=0.35, 10=0.3, 25=0.2804, 100=0.251, 250=0.23256, 500=0.21948 (USD)", RoHS=Yes, Stock=10712, Supplier=Digikey
U1: "SMD Module, ESP32-S3FN8, 8 mb Sp", LCSC Part Number=C2913206, Manufacturer="Espressif Systems", Supplier Part Number=356-ESP32-S3-MINI1N8, Category=LDO, ComponentLink1Description=https://datasheet.octopart.com/ESP32-S3-MINI-1-N8-Espressif-Systems-datasheet-188867343.pdf?src-supplier=TME, ComponentLink1URL=https://datasheet.octopart.com/ESP32-S3-MINI-1-N8-Espressif-Systems-datasheet-188867343.pdf?src-supplier=TME, Manufacturer Part Number=ESP32-S3-MINI-1-N8, Pricing="1=6.15, 10=5.5, 50=4.31, 100=4.19, 1000=3.65, 10000=3.44 (USD)", RoHS=No, Stock=8951, Supplier=Mouser
U2: "IC USB SERIAL FULL UART 20QFN", LCSC Part Number=C132159, Manufacturer=FTDI, Supplier Part Number=768-1128-1-ND, Category="Interface ICs", ComponentLink1Description=https://datasheet.ciiva.com/4787/ds-ft231x-13571-4787570.pdf?src-supplier=Mouser, ComponentLink1URL=https://datasheet.ciiva.com/4787/ds-ft231x-13571-4787570.pdf?src-supplier=Mouser, ComponentLink2Description=https://datasheet.ciiva.com/30475/0900766b811020d3-30475405.pdf?src-supplier=Rs, ComponentLink2URL=https://datasheet.ciiva.com/30475/0900766b811020d3-30475405.pdf?src-supplier=Rs, ComponentLink3Description=https://datasheet.ciiva.com/1787/ds-ft231x-1787312.pdf?src-supplier=Digikey, ComponentLink3URL=https://datasheet.ciiva.com/1787/ds-ft231x-1787312.pdf?src-supplier=Digikey, ComponentLink4Description=https://datasheet.ciiva.com/1787/ft-x-series-1787313.pdf?src-supplier=Digikey, ComponentLink4URL=https://datasheet.ciiva.com/1787/ft-x-series-1787313.pdf?src-supplier=Digikey, ComponentLink5Description=https://datasheet.ciiva.com/1787/ft-x-series-1787314.pdf?src-supplier=Digikey, ComponentLink5URL=https://datasheet.ciiva.com/1787/ft-x-series-1787314.pdf?src-supplier=Digikey, Height=800um, Lead Free=5697LeadFree, Manufacturer Part Number=FT231XQ-R, Pricing="1=2.34, 25=2.27, 100=2.2, 250=2, 500=1.82002, 1000=1.7625 (USD)", RoHS=Yes, Stock=837, Supplier=Digikey
U3: "IC REG LIN 3.3V 1.5A SOT-223-4", LCSC Part Number=C181262, Manufacturer="Texas Instruments", Supplier Part Number=296-24897-1-ND, Category="Voltage Regulators - Linear", ComponentLink1Description=https://datasheet.ciiva.com/2046/-2046068.pdf?src-supplier=Digikey, ComponentLink1URL=https://datasheet.ciiva.com/2046/-2046068.pdf?src-supplier=Digikey, Lead Free=5697LeadFree, Manufacturer Part Number=TL1963A-33DCYR, Pricing="1=3.13, 10=2.344, 25=2.1476, 100=1.9323, 250=1.82956, 500=1.76766, 1000=1.71669 (USD)", RoHS=Yes, Stock=4828, Supplier=Digikey, Thickness=1.6mm

## Via types
v1: diameter 24, hole 12, L1 to L4, tented both sides, 161 vias

## Nets (pads, with @x,y where several pads share a name; then routed paths per layer and width w, separated by ;. In a path a pad name is that pad's centre, name@x,y a point inside that pad or via, vN(x,y) a via of type N, cw(c..) or ccw(c..) an arc to the next point about the centre after c; other vN are vias at no path point)
+3V3: C4.1 C5.1 C14.2 C15.1 J1.2 J2.1 J6.2 R2.1 R3.2 R4.2 R5.1 R22.2 U1.3 | length 4522.9
  L1 w15: R2.1 757.01,508.82 775.83,490 v1(790,490) ; R5.1 927.64,850.63 950.63,850.63 v1(970,870) ; C14.2 2487.2,856.38 2491.52,860.69 2492.95,860.69 2501.73,869.48 2501.73,885.83 2500,887.56 v1(2500,890) ; v1(2540,890) 2537.8,887.8 C15.1 2538.65,854.15 2538.65,830.76 2562.36,807.04 U1.3 ; J1.2 2555,950 2622.8,882.2 C5.1 ; J2.1 2657.2,57.2 C4.1
  L1 w20: J6.2 1425,566.28 1436.72,578 1487.25,578 1494.37,570.89 1522,543.25 1522,543 1630,435 1630,327.01 1648.19,308.82 1648.19,307.64 1648.82,307.01 1701.19,307.01 1785,223.2 1785,220.83 1788.82,217.01 R3.2 ; R4.2 1791.18,782.99 1804.17,770 v1(1815,770)
  L2 w15: v1(2500,890) v1(2540,890)
  L2 w20: 2516.57,800 2535,800 2560,775 2560,468.5 2594.8,433.7 2594.8,184.95 2650,129.75 J2.1
  L2 w40: v1(790,490) 798,498 807.4,498 908,598.6 908,688.6 922,702.6 922,822 v1(970,870) 980,880 1220,880 1357.23,742.77 1425,742.77 ; J6.2 1425,742.77 ; J1.2 2545.41,945.41 2545.41,895.41 v1(2540,890) 2540,823.43 2516.57,800 1845,800 v1(1815,770) 1787.77,742.77 1425,742.77
+3V3_FTDI: C6.1 C8.1 R5.2 R8.1 U2.10 U2.20 | length 917.5
  L1 w6: v1(830,845) 832.68,847.68 856.47,847.68 858.79,850 R5.2
  L1 w10.01: 605,730 605.63,730.63 U2.10 ; U2.20 796.71,809.37 797.17,809.83 797.17,810 803.03,815.87 830,815.87
  L1 w15: C8.1 547.2,601.4 ; C8.1@547.2,681.38 595.83,730 605,730 ; R8.1 552.79,572.99 547.2,578.57 547.2,601.4 ; v1(645,685) 602.34,642.34 588.14,642.34 547.2,601.4 ; 830,815.87 864.27,815.87 868.03,812.1 882.08,812.1 C6.1@892.8,801.38 ; C6.1@892.99,805.69 R5.2
  L4 w40: v1(645,685) 655,685 675,705 765,705 830,770 v1(830,845)
+3V3_REG: C12.2 C13.2 J6.1 U3.3 | length 1225.4
  L1 w15: v1(530,160) C13.2 C12.2 581.67,201.12 655.3,201.12 U3.3
  L1 w20: v1(490,160) v1(530,160) v1(570,160)
  L2 w40: v1(570,160) 625,160 665,200 ; 1335,460 J6.1
  L2 w60: 665,200 738,273 1196.54,273 1335,411.46 1335,460
+5V: C9.1 C11.2 J1.22 J5.2 R1.1 U3.1 | length 1228.3
  L1 w12: J5.2 455.83,500 578.62,377.2 C11.2 581.67,378.88 655.3,378.88 U3.1
  L1 w15: C9.1 547.2,947.2 J1.22 ; v1(615,510) R1.1
  L4 w40: J5.2 490,500 ; J1.22 550,659.4 517,626.4 517,527 490,500 ; v1(615,510) 605,500 490,500
+5V_VBUS1: C1.1 D3.1 J3.A4B9 J3.B4A9 J5.1 R10.1 | length 1477
  L1 w12: D3.1 387.8,630 C1.1
  L1 w15: J5.1 380.14,544.86 530.14,544.86 614.5,460.5 802.22,460.5 860.72,519 960.72,519 979.5,537.78 979.5,562.22 979.5,592.5 979.5,612.22 956.72,635 930.83,635 907.01,658.82 R10.1
  L1 w20: J3.A4B9 191.72,874.41 180,862.69 180,697.15 191.72,685.43 284.6,685.43 308.23,661.81 367.97,661.81 387.8,641.99 387.8,630 375,617.2 J5.1
+5V_VBUS2: C10.1 D6.1 J4.A4B9 J4.B4A9 J5.3 | length 649.9
  L1 w12: D6.1 387.8,370 C10.1 422.8,402.2 J5.3
  L1 w20: J4.B4A9 204.41,125.59 185,145 185,295 204.57,314.57 J4.A4B9 310,314.57 376.08,314.57 387.8,326.28 387.8,370
+VCC_FTDI: C2.2 C3.1 R1.2 R2.2 U2.12 | length 198.4
  L1 w10.01: 690,645 690.32,645.32 U2.12
  L1 w15: 690,645 690,644.17 722.8,611.38 C3.1 C2.2 722.89,559.9 722.89,510.1 R1.2
BTN_GPIO0: C17.1 Q2.3 R21.1 SW2.1 SW2.2 | length 949.9
  L1 w6: Q2.3 1157.42,742.58 1238.58,661.42 SW2.2 1597.13,661.42 1622.91,687.2 C17.1 1770.4,687.2 1873.19,790 R21.1
CHIP_PU: C16.1 J2.3 Q1.3 R22.1 SW1.1 SW1.2 U1.45 | length 3517.8
  L1 w6: Q1.3 1159.82,667.6 1192.13,667.6 1197.99,661.75 1197.99,629.61 1207.61,620 1384.14,620 1390,614.14 1390,576.21 1340,526.21 1340,473.79 1348.79,465 1375,465 1465,375 1465,210 1416.42,161.42 ; SW1.2 1416.42,161.42 ; v1(1490,530) 1490,327.76 1544.77,272.99 R22.1 C16.1 1617.2,217.2 1561.42,161.42 SW1.1 1416.42,161.42 ; J2.3 2500,100 2526.82,100 2627.84,201.02 2627.84,222.96 U1.45
  L4 w6: v1(1490,530) 1503,543 1611.28,543 1639.19,570.91 1840.91,570.91 1871,601 2037,601 2270.04,367.96 2406.18,367.96 2406.22,368 2497.98,368 2589.8,276.18 2589.8,189.8 J2.3
CON1_USB_N: D4.1 J3.A7 J3.B7 R6.1 | length 457
  L1 w6.03: J3.A7 280.47,770.08 284,773.61 284,806.45 281,809.45 ; J3.B7 281,809.45 ; v1(355,770) 351.56,773.44 346.56,773.44 335.2,784.8 335.2,797.01 D4.1 304.79,797.2 292.55,809.45 281,809.45 ; v1(480,740) 485,735 R6.1
  L4 w6.03: v1(355,770) 342.01,782.99 342.01,802.2 359.89,820.08 384.7,820.08 451.79,752.99 467.01,752.99 v1(480,740)
CON1_USB_P: D5.1 J3.A6 J3.B6 R7.1 | length 510.1
  L1 w6.03: J3.A6 246.4,791 216.14,791 212.61,787.47 212.61,753.93 216.14,750.39 J3.B6 264.37,750.39 265.27,749.49 275.79,749.49 282.49,742.8 D5.1 ; v1(315,770) 318.44,766.56 323.44,766.56 334.8,755.2 D5.1@334.8,742.99 ; v1(480,780) 485,785 R7.1
  L4 w6.03: v1(315,770) 327.99,782.99 327.99,808.01 354.08,834.11 390.51,834.11 457.6,767.01 467.01,767.01 v1(480,780)
CON2_USB_N: D7.1 J4.A7 J4.B7 R23.1 | length 1948.3
  L1 w6.03: J4.A7 247.4,210 218.14,210 214.61,213.53 214.61,246.07 218.14,249.61 J4.B7 283.87,249.61 313.47,220 D7.1 339.34,220 343.21,216.13 343.21,210.55 346.75,207.01 437.01,207.01 v1(450,220) ; v1(1875,500) 1893,518 R23.1
  L4 w6.03: v1(450,220) 462.99,207.01 575.37,207.01 593.36,189.03 665,189.03 927.95,451.98 1420.85,451.98 1458.88,490.01 1862.48,490.01 1872.47,500 v1(1875,500)
CON2_USB_P: D8.1 J4.A6 J4.B6 R24.1 | length 1912
  L1 w6.03: J4.B6 283.58,190.55 ; J4.A6 279.92,229.92 283.58,226.26 283.58,190.55 ; v1(450,180) 437.01,192.99 346.75,192.99 343.21,189.45 343.21,183.87 339.34,180 D8.1 330.08,180 319.53,190.55 283.58,190.55 ; v1(1875,466) 1893,448 R24.1
  L4 w6.03: v1(450,180) 462.99,192.99 569.56,192.99 587.55,175 670.81,175 933.77,437.95 1426.66,437.95 1464.69,475.99 1862.48,475.99 1872.47,466 v1(1875,466)
CON_ESP_USB_N: J2.21 R25.1 | length 1703.6
  L1 w6.03: J2.21 689.45,50 692.99,53.53 692.99,89.87 768.56,165.44 768.56,197.48 758,208.04 v1(758,210) ; R25.1 v1(2025,518)
  L4 w6.03: v1(758,210) 775.97,227.97 775.97,243.97 908.99,376.99 1479.99,376.99 1540.05,437.05 1736.32,437.05 1749.34,424.03 1913.19,424.03 1979.17,490.01 2021.47,490.01 2025,493.55 v1(2025,518)
CON_ESP_USB_P: J2.20 R26.1 | length 1674.3
  L1 w6.03: J2.20 710.55,50 707.01,53.53 707.01,84.06 782.59,159.63 782.59,192.92 793.14,203.47 v1(793.14,205.44) ; R26.1 v1(2025,448)
  L4 w6.03: v1(793.14,205.44) 790,208.58 790,238.16 914.8,362.95 1485.8,362.95 1545.86,423.01 1730.51,423.01 1743.52,410 1919,410 1984.99,475.99 2021.47,475.99 2025,472.45 v1(2025,448)
CON_GPIO0: J1.3 R20.1 | length 564.3
  L1 w6: R20.1 1952.99,877.14 1958.85,883 2383,883 J1.3
DTR_FTDI: Q2.2 R16.1 U2.18 | length 412
  L1 w6: U2.18 796.71,770 800.39,766.32 829,766.32 830,765.32 848.32,747 928.82,747 1008.82,667.01 R16.1 1010,715.47 1067.12,772.6 Q2.2
ESP_USB_N: R23.2 R25.2 U1.23 | length 197.3
  L1 w6.03: R23.2 1952.99,493.55 1956.52,490.01 2041.1,490.01 2041.37,490.28 2103.18,490.28 2106.72,493.82 2106.72,495.14 2111.57,500 U1.23
ESP_USB_P: R24.2 R26.2 U1.24 | length 197.3
  L1 w6.03: R24.2 1952.99,472.45 1956.52,475.99 2046.91,475.99 2047.18,476.25 2103.18,476.25 2106.72,472.72 2106.72,471.39 2111.57,466.54 U1.24
FTDI_RESET: C7.1 R8.2 U2.11 | length 146
  L1 w6: R8.2 600.1,607.11 649.9,607.11 C7.1 650,640 660,650 670.63,660.63 U2.11
FTDI_USB_N: R6.2 U2.9 | length 100.3
  L1 w6.03: R6.2 554.62,742.61 554.62,749.45 558.16,752.99 593.32,752.99 593.48,753.14 619.05,753.14 621.88,750.32 U2.9
FTDI_USB_P: R7.2 U2.8 | length 100.3
  L1 w6.03: R7.2 554.62,777.39 554.62,770.55 558.16,767.01 587.51,767.01 587.67,767.17 619.05,767.17 621.88,770 U2.8
GND: C1.2 C2.1 C3.2 C4.2 C5.2 C6.2 C7.2 C8.2 C9.2 C10.2 C11.1 C12.1 C13.1 C14.1 C15.2 C16.2 C17.2 D1.1 D3.2 D4.2 D5.2 D6.2 D7.2 D8.2 J1.1 J1.23 J2.2 J2.24 J3.A1B12 J3.B1A12 J3.S1 J3.S2 J3.S3 J3.S4 J4.A1B12 J4.B1A12 J4.S1 J4.S2 J4.S3 J4.S4 R9.2 R11.1 R12.1 R13.1 R14.1 R15.1 SW1.3 SW1.4 SW2.3 SW2.4 U1.1 U1.2 U1.42 U1.43 U1.46 U1.47 U1.48 U1.49 U1.50 U1.51 U1.52 U1.53 U1.54 U1.55 U1.56 U1.57 U1.58 U1.59 U1.60 U1.61 U1.62 U1.63 U1.64 U1.65 U1.66 U1.67 U1.68 U1.69 U1.70 U1.71 U1.72 U1.73 U2.3 U2.13 U2.21 U3.2 U3.4 | length 3803.8
  L1 w10.01: v1(700,890) 710,880 U2.3 ; U2.13 710.23,694.35 710.23,669.77 v1(730,650)
  L1 w12: v1(320,420) 320,416.75 327.2,409.55 D6.2 ; v1(320,580) 320,583.25 327.2,590.45 D3.2 ; D8.2 364.41,154.41 v1(370,160) ; D7.2 335.4,245.19 364.81,245.19 v1(370,240) ; D5.2 357.2,717.2 367.7,727.7 367.7,737.7 v1(370,740) ; D4.2 339.92,822.8 365,847.87 v1(365,860) ; v1(455,595) 456.1,596.1 456.1,628.9 C1.2